# EAGLE board Skaarhoj BI8-1x8 (EAGLE 6.2)
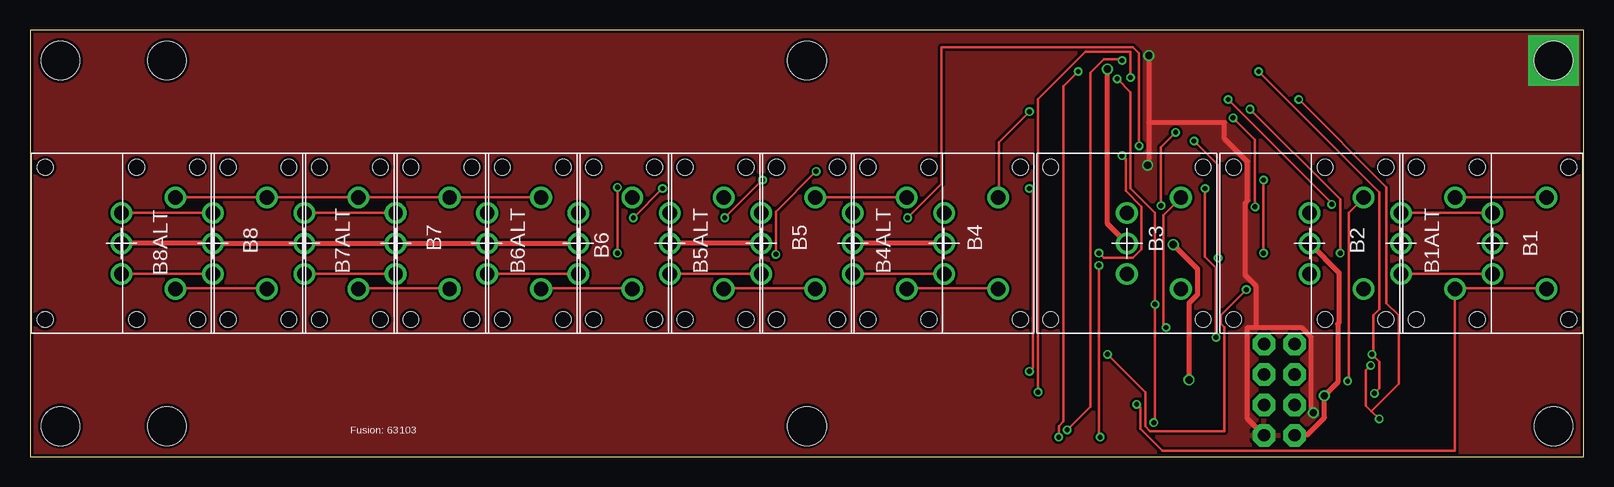
[diagram p0: board, top side]
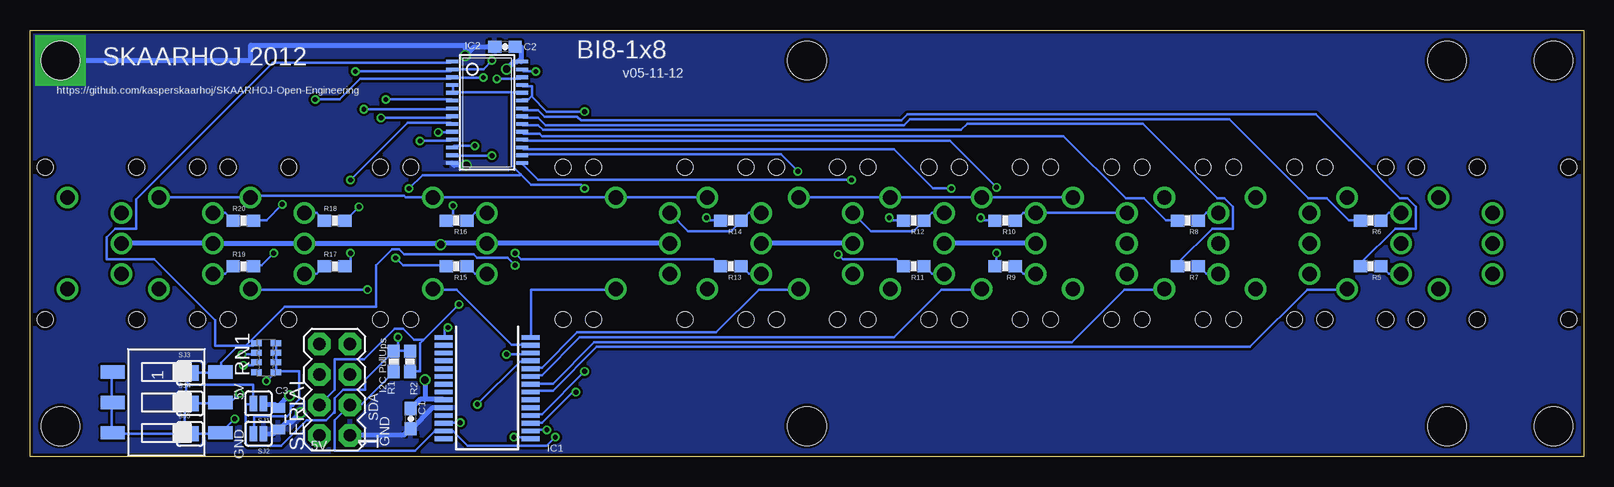
[diagram p1: board, bottom side, seen from below]

Size 129.54 x 35.56 mm. Coordinates in mm from the lower left corner, seen from the top.
Outline: 0,0 129.54,0 129.54,35.56 0,35.56 0,0
Copper layers (1*16): Top 0.035mm / dielectric 1.5mm / Bottom 0.035mm
Design rules: minimum track width 6mil, minimum drill 12mil, track to track 6mil, track to pad 6mil, pad to pad 6mil, via to via 6mil, smd to smd 0mil, copper to edge 10mil, drill to drill 10mil, minimum pad ring 10mil, minimum via ring 6mil, stop-mask expansion 2mil, vias tented up to drill 100mil, thermal gap 10mil
Net classes: 0 default: width 0.203 mm, drill 0.406 mm, clearance 0.203 mm; 1 Power: width 0.406 mm, drill 0.61 mm, clearance 0.203 mm
Holes 3.2 mm at 2.54,33.02 2.54,2.54 64.77,2.54 64.77,33.02 127,33.02 127,2.54 11.43,33.02 11.43,2.54

## Footprints (pad centres in the part's own frame; a part is rotated, then mirrored left to right if it is on the bottom)
LP11 = drill 1.2: COM 0,0; P$2 0,2.54; P$3 0,-2.54; P$4 4.5,3.81; P$5 4.5,-3.81 | hole 1.3: -6.35,6.35; 6.35,6.35; 6.35,-6.35; -6.35,-6.35
0603-CAP = smd 1.1 x 1: 1 -0.85,0; 2 0.85,0
0805 = smd 0.8 x 1.2: 1 -0.9,0; 2 0.9,0
SSOP28 = smd 0.4 x 1.5: 1 -4.225,-3.625; 2 -3.575,-3.625; 3 -2.925,-3.625; 4 -2.275,-3.625; 5 -1.625,-3.625; 6 -0.975,-3.625; 7 -0.325,-3.625; 8 0.325,-3.625; 9 0.975,-3.625; 10 1.625,-3.625; 11 2.275,-3.625; 12 2.925,-3.625; 13 3.575,-3.625; 14 4.225,-3.625; 15 4.225,3.625; 16 3.575,3.625; 17 2.925,3.625; 18 2.275,3.625; 19 1.625,3.625; 20 0.975,3.625; 21 0.325,3.625; 22 -0.325,3.625; 23 -0.975,3.625; 24 -1.625,3.625; 25 -2.275,3.625; 26 -2.925,3.625; 27 -3.575,3.625; 28 -4.225,3.625
TSSOP28 = smd 0.305 x 0.991: 1 -4.225,-2.918; 2 -3.575,-2.918; 3 -2.925,-2.918; 4 -2.275,-2.918; 5 -1.625,-2.918; 6 -0.975,-2.918; 7 -0.325,-2.918; 8 0.325,-2.918; 9 0.975,-2.918; 10 1.625,-2.918; 11 2.275,-2.918; 12 2.925,-2.918; 13 3.575,-2.918; 14 4.225,-2.918; 15 4.225,2.918; 16 3.575,2.918; 17 2.925,2.918; 18 2.275,2.918; 19 1.625,2.918; 20 0.975,2.918; 21 0.325,2.918; 22 -0.325,2.918; 23 -0.975,2.918; 24 -1.625,2.918; 25 -2.275,2.918; 26 -2.925,2.918; 27 -3.575,2.918; 28 -4.225,2.918
0603-RES = smd 1.1 x 1: 1 -0.85,0; 2 0.85,0
CAY16_HAND = smd 0.5 x 0.904: 1 -1.2,-0.813; 2 -0.4,-0.813; 3 0.4,-0.813; 4 1.2,-0.813; 5 1.2,0.813; 6 0.4,0.813; 7 -0.4,0.813; 8 -1.2,0.813
SMS-003 = smd 1.092 x 2.007: 1 -2.54,-4.496; 2 0,-4.496; 3 2.54,-4.496; 4 2.54,4.496; 5 0,4.496; 6 -2.54,4.496
2X4 = drill 1.016 pad 1.88 octagon: 1 -3.81,-1.27; 2 -3.81,1.27; 3 -1.27,-1.27; 4 -1.27,1.27; 5 1.27,-1.27; 6 1.27,1.27; 7 3.81,-1.27; 8 3.81,1.27
SJ_2S = smd 0.635 x 1.27: 1 -0.412,0; 2 0.412,0

## Placement (x,y rotation side)
B1  LP11-B"  [LP11]  121.92,17.78 0 top
B1ALT  LP11-B"  [LP11]  114.3,17.78 0 top
B2  LP11-B"  [LP11]  106.68,17.78 0 top
B3  LP11-B"  [LP11]  91.44,17.78 0 top
B4  LP11-B"  [LP11]  76.2,17.78 0 top
B4ALT  LP11-B"  [LP11]  68.58,17.78 0 top
B5  LP11-B"  [LP11]  60.96,17.78 0 top
B5ALT  LP11-B"  [LP11]  53.34,17.78 0 top
B6  LP11-B"  [LP11]  45.72,17.78 0 top
B6ALT  LP11-B"  [LP11]  38.1,17.78 0 top
B7  LP11-B"  [LP11]  30.48,17.78 0 top
B7ALT  LP11-B"  [LP11]  22.86,17.78 0 top
B8  LP11-B"  [LP11]  15.24,17.78 0 top
B8ALT  LP11-B"  [LP11]  7.62,17.78 0 top
C1  100nF  [0603-CAP]  97.79,3.17 90 bottom
C2  100nF  [0603-CAP]  89.94,34.16 180 bottom
C3  10uF  [0805]  108.86,3.17 270 bottom
IC1  MCP23017SS  [SSOP28]  91.44,5.71 270 bottom
IC2  PCA9685  [TSSOP28]  91.44,28.7 270 bottom
R1  10K  [0603-RES]  99.21,7.95 270 bottom
R2  10K  [0603-RES]  97.84,7.95 270 bottom
R5  270  [0603-RES]  17.78,15.88 180 bottom
R6  270  [0603-RES]  17.78,19.68 180 bottom
R7  270  [0603-RES]  33.02,15.88 180 bottom
R8  270  [0603-RES]  33.02,19.68 180 bottom
R9  270  [0603-RES]  48.26,15.88 180 bottom
R10  270  [0603-RES]  48.26,19.68 180 bottom
R11  270  [0603-RES]  55.88,15.88 180 bottom
R12  270  [0603-RES]  55.88,19.68 180 bottom
R13  270  [0603-RES]  71.12,15.88 180 bottom
R14  270  [0603-RES]  71.12,19.68 180 bottom
R15  270  [0603-RES]  93.98,15.88 180 bottom
R16  270  [0603-RES]  93.98,19.68 180 bottom
R17  270  [0603-RES]  104.14,15.88 0 bottom
R18  270  [0603-RES]  104.14,19.68 0 bottom
R19  270  [0603-RES]  111.76,15.88 0 bottom
R20  270  [0603-RES]  111.76,19.68 0 bottom
RN1  10K  [CAY16_HAND]  109.86,8.26 90 bottom
S2  SWS003  [SMS-003]  118.16,4.52 270 bottom
SERIAL  M04X2  [2X4]  104.14,5.59 90 bottom
SJ1  SOLDERJUMPERNC  [SJ_2S]  110.49,4.45 180 bottom
SJ2  SOLDERJUMPERNC  [SJ_2S]  110.49,1.91 180 bottom
SJ3  SOLDERJUMPERNC  [SJ_2S]  116.2,6.99 0 bottom
SJ4  SOLDERJUMPERNC  [SJ_2S]  116.2,4.45 0 bottom
SJ5  SOLDERJUMPERNC  [SJ_2S]  116.2,1.91 0 bottom

## Library data of the parts
B1 B1ALT B2-B4 B4ALT B5 B5ALT B6 B6ALT B7 B7ALT B8 B8ALT = SKAARHOJ
C1-C3 R1 R2 R5-R20 SERIAL SJ1-SJ5 = SparkFun
IC1 = microchip; MF: MICROCHIP; MPN: MCP23017-E/SS; OC_FARNELL: 1467674; OC_NEWARK: 31K2960
IC2 = wsmith
RN1 = SKAARHOJ; OC_FARNELL: unknown; OC_NEWARK: unknown
S2 = smd-special

## Nets
5V [Power]: B1.COM B1ALT.COM B2.COM B3.COM B4.COM B4ALT.COM B5.COM B5ALT.COM B6.COM B6ALT.COM B7.COM B7ALT.COM B8.COM B8ALT.COM C1.2 C2.1 C3.1 IC1.9 IC2.28 SERIAL.2 SJ1.1
5VL: IC1.18 IC2.4 IC2.5 IC2.24 R1.1 R2.1 S2.1 S2.2 S2.3 SJ1.2 SJ3.1 SJ4.1 SJ5.1
A0: IC1.15 IC2.1 RN1.5 S2.6 SJ3.2
A1: IC1.16 IC2.2 RN1.6 S2.5 SJ4.2
A2: IC1.17 IC2.3 RN1.7 S2.4 SJ5.2
DISP_DATA_OUT: SERIAL.6
GND [Power]: C1.1 C2.2 C3.2 IC1.10 IC2.14 SERIAL.1 SJ2.1
GNDL: B1.P$4 B1ALT.P$4 B2.P$4 B3.P$4 B4.P$4 B4ALT.P$4 B5.P$4 B5ALT.P$4 B6.P$4 B6ALT.P$4 B7.P$4 B7ALT.P$4 B8.P$4 B8ALT.P$4 IC1.1 IC2.23 IC2.25 RN1.1 RN1.2 RN1.3 RN1.4 SJ2.2
GPA0: B8.P$5 B8ALT.P$5 IC1.21
GPA1: B7.P$5 B7ALT.P$5 IC1.22
GPA2: B6.P$5 B6ALT.P$5 IC1.23
GPA3: B5.P$5 B5ALT.P$5 IC1.24
GPA4: B1.P$5 B1ALT.P$5 IC1.25
GPA5: B2.P$5 IC1.26
GPA6: B3.P$5 IC1.27
GPA7: B4.P$5 B4ALT.P$5 IC1.28
I2C_SCL: IC1.12 IC2.26 R2.2 SERIAL.4
I2C_SDA: IC1.13 IC2.27 R1.2 SERIAL.3
L0: B1.P$2 B1ALT.P$2 R20.1
L1: B1.P$3 B1ALT.P$3 R19.1
L2: B2.P$2 R18.1
L3: B2.P$3 R17.1
L4: B3.P$2 R16.1
L5: B3.P$3 R15.1
L6: B4.P$2 B4ALT.P$2 R14.1
L7: B4.P$3 B4ALT.P$3 R13.1
L8: B5.P$2 B5ALT.P$2 R12.1
L9: B5.P$3 B5ALT.P$3 R11.1
L10: B6.P$2 B6ALT.P$2 R10.1
L11: B6.P$3 B6ALT.P$3 R9.1
L12: B7.P$2 B7ALT.P$2 R8.1
L13: B7.P$3 B7ALT.P$3 R7.1
L14: B8.P$2 B8ALT.P$2 R6.1
L15: B8.P$3 B8ALT.P$3 R5.1
N$4: IC2.13 R13.2
N$5: IC2.12 R14.2
N$7: IC2.11 R15.2
N$9: IC2.10 R16.2
N$10: IC2.9 R17.2
N$11: IC2.8 R18.2
N$12: IC2.7 R19.2
N$19: IC2.6 R20.2
N$20: IC2.15 R12.2
N$21: IC2.16 R11.2
N$22: IC2.17 R10.2
N$23: IC2.18 R9.2
N$24: IC2.19 R8.2
N$25: IC2.20 R7.2
N$26: IC2.21 R6.2
N$27: IC2.22 R5.2
SDI_MOSI: SERIAL.8
SDI_SCLK: SERIAL.7
SLIDER_IN: SERIAL.5

## Tracks (layer width: path | path; a pad name or v marks a point on that pad's centre or on a via)
5V  (via drill 0.61)
  Top 0.406: v89.81,32.31 89.81,19.41 B3.COM | v96.62,6.4 96.62,12.8 97.33,13.51 97.33,15.65 v95.3,17.68 | SERIAL.2 105.46,1.83 106.48,1.83 107.9,3.25 v107.9,5.08 109.02,6.2 109.02,11.07 109.12,11.18 109.12,15.34 B2.COM | B4.COM B4ALT.COM | B5.COM B5ALT.COM | B8ALT.COM B8.COM B7ALT.COM B7.COM B6ALT.COM B6.COM
  Bottom 0.406: 96.62,4.78 95.1,4.78 IC1.9 | 96.62,4.78 97.03,4.78 97.74,4.06 C1.2 | C2.1 89,34.14 88.59,34.14 88.59,33.02 IC2.28 88.8,33.02 88.9,32.92 89.2,32.92 v89.81,32.31 | v96.62,6.4 96.62,4.78 | SJ1.1 110.03,4.37 109.12,4.37 108.92,4.17 C3.1 108.81,4.27 108,5.08 v107.9,5.08 | B1.COM B1ALT.COM B2.COM 95.4,17.78 v95.3,17.68 95.2,17.78 B3.COM B4.COM | B6.COM B5ALT.COM | B5.COM B4ALT.COM
5VL  (via drill 0.41)
  Top 0.203: v83.31,7.11 83.62,7.42 83.62,22.05 v83.31,22.35 | v98.86,9.96 98.86,15.75 97.94,16.66 v97.94,22.35
  Bottom 0.203: S2.1 122.73,7.01 122.73,4.57 S2.2 122.73,4.47 122.73,2.03 S2.3 122.63,1.93 116.74,1.93 SJ5.1 116.64,1.93 116.64,4.37 SJ4.1 116.53,4.47 116.53,5.99 116.33,5.99 116.28,6.04 | 98.86,8.84 99.16,8.84 R1.1 | 98.86,8.84 97.84,8.84 R2.1 | 116.28,6.04 116.53,6.3 116.53,6.91 SJ3.1 | 116.28,6.04 116.23,5.99 110.95,5.99 110.95,4.47 SJ1.2 110.95,4.37 111.56,4.37 111.56,1.12 111.35,0.91 108.61,0.91 106.48,3.05 104.85,3.05 104.24,3.66 104.14,3.66 104.14,4.88 103.43,5.59 101.6,5.59 101.6,6.4 99.26,8.74 R1.1 | 94.28,30.38 89.41,30.38 | 89.41,30.38 88.59,30.38 IC2.24 | 94.28,30.38 IC2.5 | 94.28,30.38 94.28,30.89 IC2.4 | v83.31,7.11 86.87,3.56 87.68,3.56 87.78,3.45 IC1.18 | v83.31,22.35 83.62,22.66 87.78,22.66 88.65,23.52 | 88.65,23.52 89.41,24.28 89.41,30.38 | v98.86,9.96 98.86,8.84 | v97.94,22.35 96.83,23.47 88.7,23.47 88.65,23.52 | 98.86,8.84 R1.1
A0  (via drill 0.41)
  Top 0.203: v89.2,1.63 89.1,1.73 v89.1,15.95
  Bottom 0.203: 111.56,9.25 112.17,9.25 112.22,9.2 | 111.56,9.25 110.95,9.25 110.74,9.45 RN1.5 | 112.22,9.2 113.59,7.82 113.59,7.11 S2.6 113.69,7.01 115.72,7.01 SJ3.2 | IC2.1 94.39,32.92 94.49,32.82 109.32,32.82 120.7,21.44 120.7,19 122.43,19 123.14,18.29 123.14,16.46 119.18,16.46 114.1,11.38 114.1,9.25 112.27,9.25 112.22,9.2 | v89.2,1.63 87.99,1.63 87.88,1.52 IC1.15 | v89.1,15.95 89.71,16.56 92.25,16.56 92.56,16.87 98.35,16.87 98.75,17.27 99.36,17.27 100.69,15.95 100.69,12.5 108.31,12.5 111.56,9.25
A1  (via drill 0.41)
  Top 0.203: v112.06,5.28 112.47,5.69 112.47,7.92 v111.86,8.53 111.96,8.53 111.96,11.79 112.47,12.29 112.47,22.05 v102.41,32.11 | v86.46,2.23 88.39,4.17 88.39,32 89.51,33.12 91.03,33.12 v91.03,33.02
  Bottom 0.203: v111.86,8.53 110.85,8.53 110.74,8.64 RN1.6 | v112.06,5.28 112.78,4.57 113.59,4.57 S2.5 113.69,4.47 115.72,4.47 SJ4.2 | v102.41,32.11 94.49,32.11 94.39,32.21 IC2.2 94.28,32.31 91.75,32.31 v91.03,33.02 | v86.46,2.23 87.78,2.23 IC1.16
A2  (via drill 0.41)
  Top 0.203: v111.76,7.62 111.35,7.21 111.35,4.27 111.81,3.81 | v112.47,3.15 111.81,3.81 | v105.77,29.77 113.08,22.45 113.08,12.8 114.1,11.79 114.1,6.1 111.81,3.81 | v84.02,5.38 84.02,29.77 87.99,33.73 91.75,33.73 v91.75,31.6
  Bottom 0.203: v111.76,7.62 110.95,7.62 110.74,7.82 RN1.7 | v112.47,3.15 113.59,2.03 S2.4 113.69,1.93 115.72,1.93 SJ5.2 | v105.77,29.77 103.73,29.77 102.01,31.5 94.49,31.5 94.39,31.6 IC2.3 94.28,31.6 v91.75,31.6 | v84.02,5.38 84.33,5.38 86.87,2.85 87.78,2.85 IC1.17
GND  (via drill 0.61, 3.2)
  Top 0.406: v93.17,24.28 93.27,24.38 93.27,27.84 | v93.27,33.43 93.27,27.84 | v106.98,3.66 106.78,3.86 106.78,9.96 105.97,10.77 102.21,10.77 | 102.21,10.77 101.5,10.77 101.5,3.15 SERIAL.1 | 93.27,27.84 99.57,27.84 99.57,26.52 101.5,24.59 101.5,21.34 101.3,21.13 101.3,15.14 102.21,14.22 102.21,10.77
  Bottom 0.406: v93.17,24.28 94.18,24.28 94.28,24.38 IC2.14 | C2.2 90.83,34.14 92.56,34.14 v93.27,33.43 93.27,34.29 111.12,34.29 111.12,33.02 v127,33.02 | IC1.10 95.1,4.06 96.01,4.06 97.74,2.34 C1.1 97.94,2.23 98.35,1.83 102.82,1.83 SERIAL.1 | SJ2.1 110.03,1.93 109.22,1.93 108.92,2.23 C3.2 108.71,2.34 108.2,2.85 107.8,2.85 v106.98,3.66
  pour Top: 0,0 0,35.56 129.54,35.56 129.54,0
  pour Bottom: 0,0 0,35.56 129.54,35.56 129.54,0
GNDL  (via drill 0.41)
  Top 0.203: B8ALT.P$4 12.19,21.64 19.71,21.64 B8.P$4 19.81,21.64 27.33,21.64 B7ALT.P$4 27.43,21.64 34.95,21.64 B7.P$4 35.05,21.64 42.57,21.64 B6ALT.P$4 | B1.P$4 126.39,21.64 118.87,21.64 B1ALT.P$4 | v109.83,6.3 109.93,6.4 109.93,20.32 111.15,21.54 B2.P$4 | v94.69,10.77 94.49,10.97 94.49,20.12 95.91,21.54 B3.P$4 | v83.31,28.75 80.77,26.21 80.77,21.64 B4.P$4 | B5.P$4 65.53,21.64 73.05,21.64 B4ALT.P$4
  Bottom 0.203: B5.P$4 65.43,21.64 57.91,21.64 B5ALT.P$4 57.81,21.64 50.29,21.64 B6.P$4 50.19,21.64 42.67,21.64 B6ALT.P$4 | RN1.1 109.02,7.11 109.02,7.82 RN1.2 109.02,7.92 109.02,8.64 RN1.3 109.02,8.74 109.02,9.45 RN1.4 | SJ2.2 110.85,1.93 110.85,3.35 108.1,3.35 107.8,3.66 107.8,4.27 107.59,4.27 107.09,4.78 107.09,7.11 108.92,7.11 RN1.1 | B1ALT.P$4 118.77,21.64 111.25,21.64 B2.P$4 111.15,21.64 111.05,21.74 98.35,21.74 98.25,21.64 96.01,21.64 B3.P$4 95.91,21.64 80.77,21.64 B4.P$4 80.67,21.64 73.15,21.64 B4ALT.P$4 | v109.83,6.3 109.12,7.01 RN1.1 | v94.69,10.77 95,10.77 95,9.96 IC1.1 | 87.73,30.02 87.68,30.07 87.68,30.89 88.49,30.89 IC2.25 | 87.73,30.02 87.99,29.77 88.49,29.77 IC2.23 | 87.73,30.02 86.46,28.75 v83.31,28.75
GPA0
  Top 0.203: B8ALT.P$5 12.19,14.02 19.71,14.02 B8.P$5
  Bottom 0.203: IC1.21 87.78,5.49 85.95,5.49 82.3,9.14 27.84,9.14 23.06,13.92 19.81,13.92 B8.P$5
GPA1
  Top 0.203: B7ALT.P$5 27.43,14.02 34.95,14.02 B7.P$5
  Bottom 0.203: IC1.22 87.78,6.1 85.95,6.1 82.5,9.55 42.67,9.55 38.3,13.92 35.05,13.92 B7.P$5
GPA2
  Top 0.203: B6ALT.P$5 42.67,14.02 50.19,14.02 B6.P$5
  Bottom 0.203: IC1.23 87.78,6.71 87.68,6.81 86.87,6.81 83.72,9.96 57.51,9.96 53.54,13.92 50.29,13.92 B6.P$5
GPA3
  Top 0.203: B5ALT.P$5 57.91,14.02 65.43,14.02 B5.P$5
  Bottom 0.203: IC1.24 87.78,7.42 86.87,7.42 83.92,10.36 72.34,10.36 68.78,13.92 65.53,13.92 B5.P$5
GPA4  (via drill 0.41)
  Top 0.203: v92.25,4.37 92.56,4.06 92.56,2.34 94.39,0.51 118.77,0.51 118.77,13.92 B1ALT.P$5 118.87,14.02 126.39,14.02 B1.P$5
  Bottom 0.203: v92.25,4.37 88.7,7.92 87.88,7.92 IC1.25
GPA5  (via drill 0.41)
  Top 0.203: v89.81,8.53 92.96,5.38 92.96,2.54 93.37,2.13 99.57,2.13 99.57,10.77 99.26,11.07 99.26,11.79 v101.4,13.92
  Bottom 0.203: v89.81,8.53 87.99,8.53 87.88,8.64 IC1.26 | v101.4,13.92 111.15,13.92 B2.P$5
GPA6
  Bottom 0.203: IC1.27 87.88,9.35 89.41,9.35 93.98,13.92 95.91,13.92 B3.P$5
GPA7
  Top 0.203: B4ALT.P$5 73.15,14.02 80.67,14.02 B4.P$5
  Bottom 0.203: IC1.28 87.78,9.96 87.78,13.92 80.77,13.92 B4.P$5
I2C_SCL  (via drill 0.41)
  Top 0.203: v90.63,31.5 91.75,30.38 91.75,22.35 93.78,20.32 v93.78,12.7 93.78,2.95 v93.67,2.85
  Bottom 0.203: v90.63,31.5 88.7,31.5 88.59,31.6 IC2.26 | 96.77,9.7 97.03,9.45 97.03,7.11 97.84,7.11 R2.2 | 96.77,9.7 v93.78,12.7 | v93.67,2.85 95,2.85 IC1.12 | SERIAL.4 104.14,5.59 104.14,8.13 101.7,8.13 99.16,10.67 98.45,10.67 97.54,9.75 96.83,9.75 96.77,9.7
I2C_SDA  (via drill 0.41)
  Top 0.203: v87.38,32.11 86.16,30.89 86.16,2.95 85.75,2.54 v85.75,1.63
  Bottom 0.203: R1.2 99.26,7.01 101.91,4.37 102.82,4.37 SERIAL.3 104.14,3.05 104.14,0.51 97.43,0.51 95.81,2.13 95.1,2.13 IC1.13 95,2.13 94.28,2.13 93.07,0.91 86.46,0.91 v85.75,1.63 | v87.38,32.11 88.39,32.11 88.49,32.21 IC2.27
L0
  Top 0.203: B1.P$2 B1ALT.P$2
  Bottom 0.203: B1ALT.P$2 113.28,20.32 112.67,19.71 R20.1
L1
  Top 0.203: B1.P$3 B1ALT.P$3
  Bottom 0.203: B1ALT.P$3 113.28,15.24 112.67,15.85 R19.1
L2
  Bottom 0.203: B2.P$2 105.66,20.32 105.05,19.71 R18.1
L3
  Bottom 0.203: B2.P$3 105.66,15.24 105.05,15.85 R17.1
L4
  Bottom 0.203: B3.P$2 92.46,20.32 93.07,19.71 R16.1
L5
  Bottom 0.203: B3.P$3 92.46,15.24 93.07,15.85 R15.1
L6
  Bottom 0.203: B4ALT.P$2 69.6,20.32 70.21,19.71 R14.1 70.31,19.61 71.12,18.8 74.68,18.8 B4.P$2
L7
  Top 0.203: B4.P$3 B4ALT.P$3
  Bottom 0.203: B4ALT.P$3 69.6,15.24 70.21,15.85 R13.1
L8
  Bottom 0.203: B5ALT.P$2 54.36,20.32 54.97,19.71 R12.1 55.07,19.61 55.88,18.8 59.44,18.8 B5.P$2
L9
  Top 0.203: B5.P$3 B5ALT.P$3
  Bottom 0.203: B5ALT.P$3 54.36,15.24 54.97,15.85 R11.1
L10
  Bottom 0.203: R10.1 47.35,19.71 46.74,20.32 B6.P$2 B6ALT.P$2
L11
  Top 0.203: B6.P$3 B6ALT.P$3
  Bottom 0.203: B6.P$3 46.74,15.24 47.35,15.85 R9.1
L12
  Top 0.203: B7.P$2 B7ALT.P$2
  Bottom 0.203: B7.P$2 31.5,20.32 32.11,19.71 R8.1
L13
  Top 0.203: B7.P$3 B7ALT.P$3
  Bottom 0.203: B7.P$3 31.5,15.24 32.11,15.85 R7.1
L14
  Top 0.203: B8.P$2 B8ALT.P$2
  Bottom 0.203: B8.P$2 16.26,20.32 16.87,19.71 R6.1
L15
  Top 0.203: B8.P$3 B8ALT.P$3
  Bottom 0.203: B8.P$3 16.26,15.24 16.87,15.85 R5.1
N$4  (via drill 0.41)
  Top 0.203: v91.03,25.09 91.34,24.79 91.34,22.15 92.66,20.83 92.66,17.27 91.95,16.56 89.51,16.56 v89.1,16.97
  Bottom 0.203: v91.03,25.09 94.28,25.09 IC2.13 | v89.1,16.97 88.59,16.46 72.54,16.46 72.03,15.95 R13.2
N$5  (via drill 0.41)
  Top 0.203: v92.46,25.91 92.46,33.63 91.95,34.14 76,34.14 76,22.76 v73.15,19.91
  Bottom 0.203: v92.46,25.91 94.18,25.91 94.28,25.81 IC2.12 | v73.15,19.91 72.95,19.71 72.03,19.71 R14.2
N$7  (via drill 0.41)
  Top 0.203: v97.03,26.31 99.06,24.28 v99.06,16.56
  Bottom 0.203: v97.03,26.31 94.49,26.31 94.39,26.42 IC2.11 | v99.06,16.56 98.45,15.95 94.89,15.95 R15.2
N$9  (via drill 0.41)
  Top 0.203: v95.5,27.03 94.28,25.81 v94.28,20.93
  Bottom 0.203: v95.5,27.03 94.39,27.03 IC2.10 | v94.28,20.93 94.28,19.71 94.79,19.71 R16.2
N$10  (via drill 0.41)
  Top 0.203: v102.82,16.97 v102.82,23.06
  Bottom 0.203: v102.82,23.06 98.04,27.84 94.49,27.84 94.39,27.74 IC2.9 | v102.82,16.97 102.82,15.95 103.23,15.95 R17.2
N$11  (via drill 0.41)
  Top 0.203: v100.28,28.25 102.11,26.42 v102.11,20.83
  Bottom 0.203: v100.28,28.25 94.49,28.25 94.39,28.35 IC2.8 | v102.11,20.83 103.23,19.71 R18.2
N$12  (via drill 0.41)
  Top 0.203: v101.7,28.96 109.22,21.44 v109.22,16.97
  Bottom 0.203: v101.7,28.96 94.39,28.96 IC2.7 | v109.22,16.97 110.24,15.95 110.85,15.95 R19.2
N$19  (via drill 0.41)
  Top 0.203: v99.87,29.77 108.51,21.13 v108.51,21.03
  Bottom 0.203: v99.87,29.77 94.39,29.77 IC2.6 | v108.51,21.03 109.83,19.71 110.85,19.71 R20.2
N$20  (via drill 0.41)
  Top 0.203: v57.91,19.91 v61.06,23.06
  Bottom 0.203: v61.06,23.06 87.17,23.06 88.49,24.38 IC2.15 | v57.91,19.91 57.71,19.71 56.79,19.71 R12.2
N$21  (via drill 0.41)
  Top 0.203: v65.53,23.77 62.18,20.42 v62.18,16.87
  Bottom 0.203: v65.53,23.77 66.95,25.2 88.49,25.2 IC2.16 | v62.18,16.87 61.77,16.46 57.3,16.46 56.79,15.95 R11.2
N$22  (via drill 0.41)
  Top 0.203: v50.29,19.91 v52.73,22.35
  Bottom 0.203: v52.73,22.35 54.25,22.35 57.51,25.6 88.39,25.6 88.49,25.7 IC2.17 | v50.29,19.91 50.09,19.71 49.17,19.71 R10.2
N$23  (via drill 0.41)
  Top 0.203: v48.97,16.97 v48.97,22.45
  Bottom 0.203: v48.97,22.45 52.83,26.31 88.39,26.31 88.49,26.42 IC2.18 | v48.97,16.97 48.97,15.95 49.07,15.95 R9.2
N$24
  Bottom 0.203: IC2.19 88.49,27.03 88.39,26.92 87.07,26.92 86.87,26.72 43.38,26.72 38.2,21.54 36.68,21.54 34.85,19.71 33.93,19.71 R8.2
N$25
  Bottom 0.203: IC2.20 88.49,27.64 87.17,27.64 86.77,27.23 51.92,27.23 51.41,27.74 36.78,27.74 30.58,21.54 29.97,21.54 29.26,20.83 29.26,19 30.99,19 33.83,16.15 33.83,15.95 R7.2
N$26
  Bottom 0.203: IC2.21 88.49,28.35 88.39,28.25 87.17,28.25 86.56,27.64 56.69,27.64 56.19,28.14 29.57,28.14 22.96,21.54 21.44,21.54 19.61,19.71 18.69,19.71 R6.2
N$27
  Bottom 0.203: IC2.22 88.49,28.96 88.39,28.85 87.17,28.85 86.67,28.35 83.92,28.35 83.62,28.04 56.9,28.04 56.39,28.55 22.35,28.55 15.34,21.54 14.73,21.54 14.02,20.83 14.02,19 15.75,19 18.59,16.15 18.59,15.95 R5.2

## Text on the board
_tsilk: Fusion: 63103
_bsilk: BI8-1x8 | SKAARHOJ 2012 | v05-11-12 | https://github.com/kasperskaarhoj/SKAARHOJ-Open-Engineering | I2C PullUps | 5V | SDA | 1 | GND | GND | 5V